# Altium PCB RoboRIOSPIBreakout.PcbDoc
Units mm, origin at the board's own origin, x right, y up, seen from the top; angles counter-clockwise.
Board outline 14.3 x 40.5 mm, 2 copper layers (Top Layer, Bottom Layer), stack 1.569 mm thick; 9 components, 9 nets, 36 pads, 0 vias.
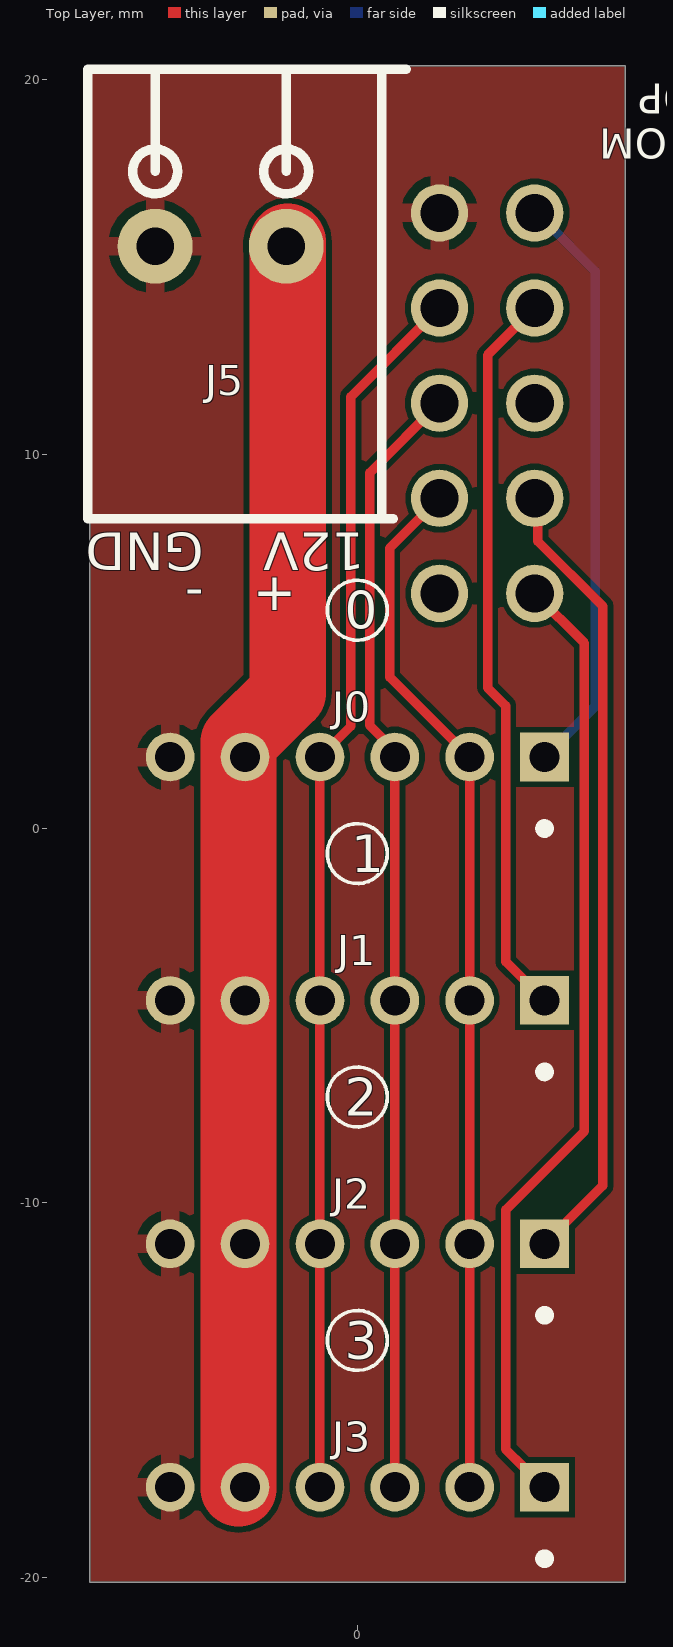
[diagram p0: Top Layer view]
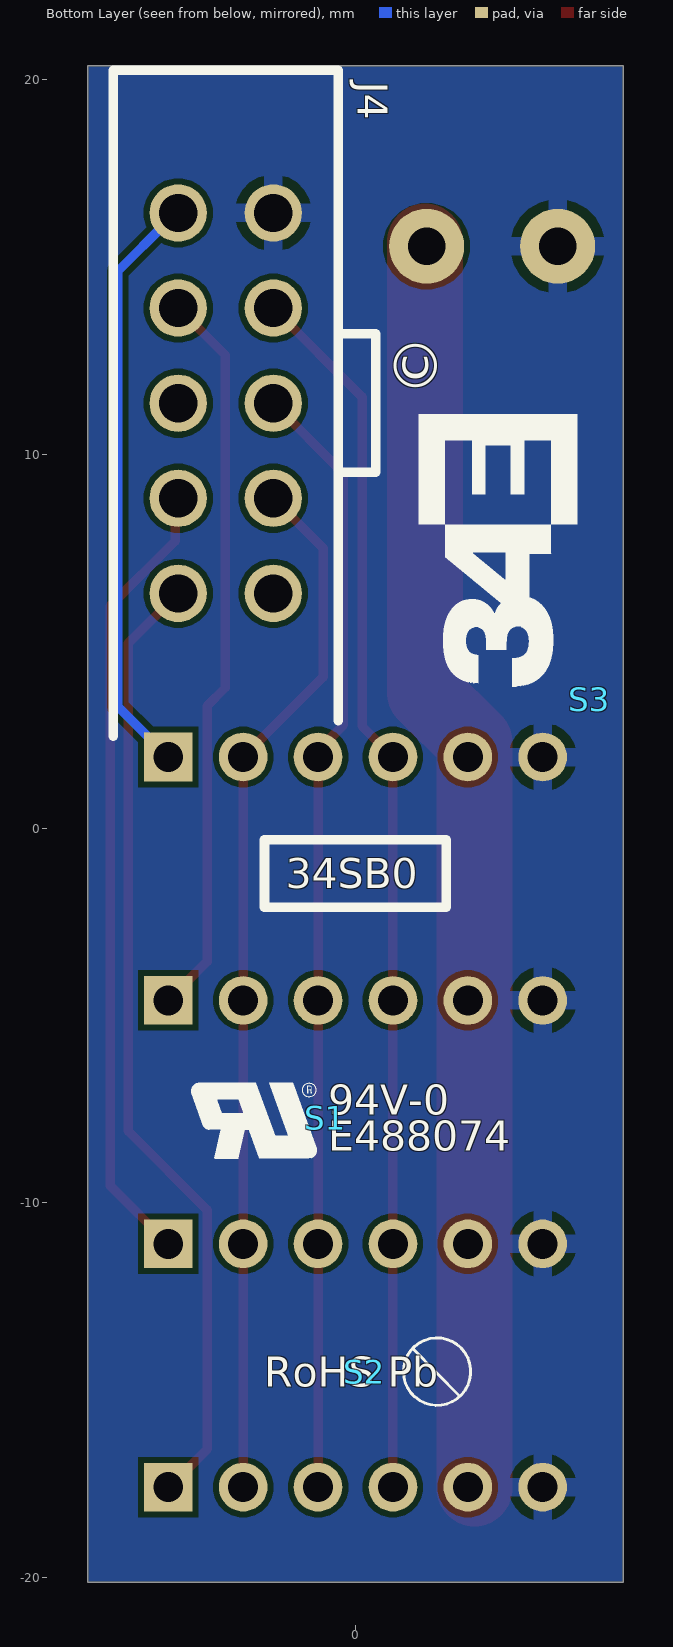
[diagram p1: Bottom Layer view, seen from below]
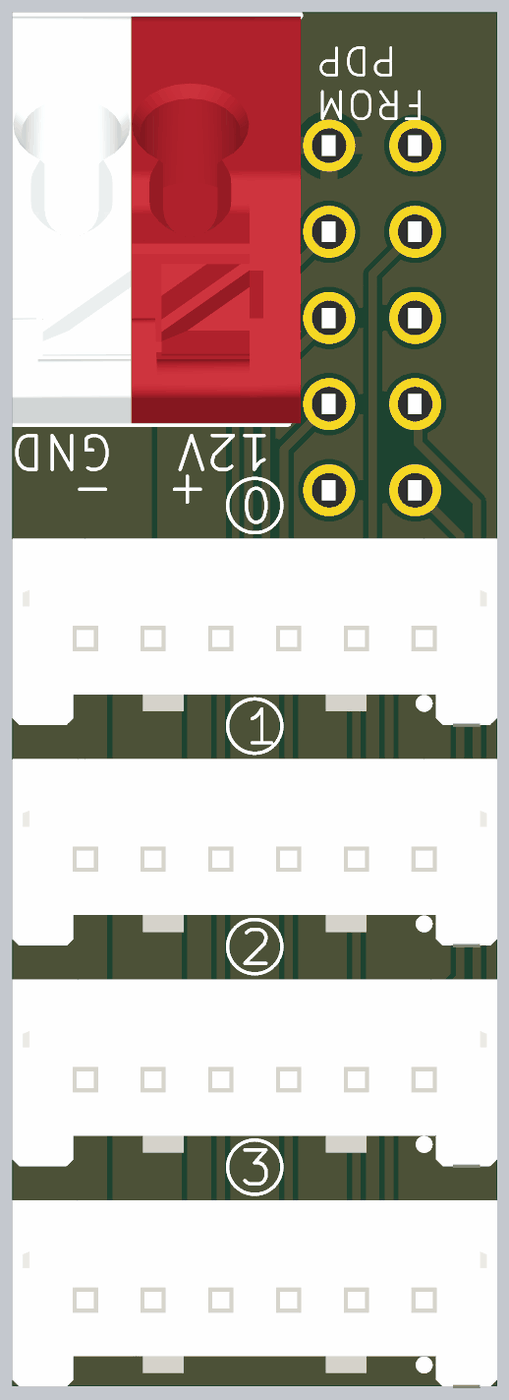
[diagram p2: 3D render of the assembled board from above, using the file's embedded part models]

## Layer stack, top to bottom
Top Solder: solder mask 0.0254, SM-002, Dk 4
Top Layer: signal copper 0.035
Dielectric 1: core 1.4986, Core-043, Dk 4.3
Bottom Layer: signal copper 0.035
Bottom Solder: solder mask 0.0254, SM-002, Dk 4

## Board outline
-7.15,-20.129 -7.15,20.371 7.15,20.371 7.15,-20.129

## Design rules (kind name [scope] priority, off if disabled: settings)
BoardOutlineClearance [IsPolygon] p1: gap=0.025 ignorepadtopadclearanceinfootprint=FALSE
Clearance [All] p1: gap=0.152 ignorepadtopadclearanceinfootprint=FALSE
MinimumSolderMaskSliver [All] p1: minsoldermaskwidth=0.203
PlaneConnect [All] p1: planeconnectstyle=Relief reliefexpansion=0.508 reliefentries=4 reliefconductorwidth=0.508 reliefairgap=0.254
PolygonConnect [All] p1: connectstyle=Relief reliefconductorwidth=0.508 reliefentries=4 polygonreliefangle="90 Angle" airgapwidth=0.254
RoutingVias [All] p1: holewidth=0.711 width=1.27 viastyle="Through Hole" minholewidth=0.711 minwidth=1.27 maxholewidth=0.711 maxwidth=1.27
SilkToSilkClearance [All] p1: silktosilkclearance=0
SilkToSolderMaskClearance [IsPad] p1: minsilkscreentomaskgap=0.152 clearancetoexposedcopper=TRUE
SolderMaskExpansion SolderMaskExpansion_Via [IsVia] p1: expansion=0.051 istentingtop=TRUE
SolderMaskExpansion [Not IsVia] p2: expansion=0.051 istentingtop=FALSE
Width [All] p1: maxlimit=2.54 minlimit=0.254 preferedwidth=0.254 minimp=50.000000 maximp=50.000000 favimp=50.000000
26 further rules are at their usual default settings.

## Components (designator, comment, footprint, x,y, rotation, side; value= is the part's Value field where it differs from the comment)
J0 "35362-0650" FP-35362-0650-MFG 0,2.11 r0 top locked
J1 "35362-0650" FP-35362-0650-MFG 0,-4.39 r0 top locked
J2 "35362-0650" FP-35362-0650-MFG 0,-10.89 r0 top locked
J3 "35362-0650" FP-35362-0650-MFG 0,-17.39 r0 top locked
J4 "SFH11-PBPC-D05-ST-BK" SFH11-PBPC-D05-ST-BK 3.465,11.36 r270 bottom locked
J5 "1713017" 1713017 -3.65,15.55 r180 top locked
S1 "" UL 0.813,-7.722 r180 bottom
S2 "" RoHS -0.229,-14.503 r180 bottom
S3 "" 34EngineeringLogo -6.248,3.454 r90 bottom

## Footprints (in the part's own frame and the unit in brackets; to place one, negate y for a bottom-side part, rotate by r counter-clockwise, add the part's x,y. Pads: shape width x height; smd on the part's side, far side on the other; paste and mask are expansions set on the pad)
34EngineeringLogo [mm]
  silkscreen extent 0.33,0.32 7.61,4.55
1713017 [mm]
  round 2 hole 1: 1(-1.75,0) 2(1.75,0)
  silkscreen extent -4.95,-4.72 3.55,7.27, body extent -5,-4.7 3.5,7.3, height 13.15
FP-35362-0650-MFG [mm]
  rect 1.3x1.3 hole 0.8 paste-1000 mask+0: 1(5,-0.2)
  round 1.3 hole 0.8 paste-1000 mask+0: 2(3,-0.2) 3(1,-0.2) 4(-1,-0.2) 5(-3,-0.2) 6(-5,-0.2)
  silkscreen extent 4.88,-2.23 5.13,-1.99, body extent -7.37,-2.95 7.37,2.95, height 0.25
RoHS [mm]
  silkscreen extent 1.05,-0.9 2.85,0.9
SFH11-PBPC-D05-ST-BK [mm]
  round 1.53 hole 1.02: 1(5.08,1.27) 2(2.54,1.27) 3(0,1.27) 4(-2.54,1.27) 5(-5.08,1.27) 6(-5.08,-1.27) 7(-2.54,-1.27) 8(0,-1.27) 9(2.54,-1.27) 10(5.08,-1.27)
  silkscreen extent -8.89,-3 8.89,4, body extent -8.89,-2.99 8.89,4.01, height 1.56
UL [mm]
  silkscreen extent -3.57,-1.1 -0.22,0.93

## Part data
J0 J1 J2 J3: library part CMP-04776-000268-1, "CONN HEADER VERT 6POS 2MM", Color=Natural, Contact Resistance=20mR, Current Rating=2A, Flammability Rating="UL94 V-0", Insulation Resistance=1GR, Max Operating Temperature=105°C, Max Voltage Rating (DC)=125.125kV, Min Operating Temperature=-40°C, Package Quantity=1000, Voltage Rating=125V, Contact Material=Brass, Contact Plating=Tin, Depth=5.5mm, Gender=Male, Glow Wire Compliant=Non-compliant, Halogen Free="Low Halogen", Height=8.5mm, Housing Color=Natural, Housing Material=Nylon, Lead Free="Lead Free", Lead Pitch=2mm, Length=14.3mm, Max Current Rating=2A, Mount="Through Hole", Number of Circuits=6, Number of Contacts=6, Number of Poles=6, Number of Positions=6, Number of Rows=1, Orientation=Vertical, Packaging=Bulk, Pitch=2mm, Radiation Hardening=No, Series=35362, Termination=Solder, Voltage Rating (AC)=125V, Voltage Rating (DC)=125V, Width=16.3mm
J4: "Female, 10C, Straight .100\"CC; No Mt. w/Center Polarizing Key; PBT, Brass, Gold Flash, 105 C", Color=Black, Manufacturer=Sullins, Package Quantity=1, Supplier Part Number 1=S9194-ND, Category=Connectors, ComponentLink1Description=https://datasheet.ciiva.com/754/sfh11-pxxc-dxx-st-xx11160-c-754555.pdf?src-supplier=Digi-Key, ComponentLink1URL=https://datasheet.ciiva.com/754/sfh11-pxxc-dxx-st-xx11160-c-754555.pdf?src-supplier=Digi-Key, Connector Type=Header, Contact Plating=Gold, Contact Type="Female Socket", Lead Free="Lead Free", Manufacturer Part Number=SFH11-PBPC-D05-ST-BK, Mount="Through Hole", Number of Positions=10, Number of Rows=2, Packaging=Tray, Pitch=0.1inch, Pricing 1="1=0.66000, 10=0.55300, 80=0.49700, 440=0.40661, 1000=0.36144, 5000=0.32630 (USD)", RoHS=Yes, RoHS Compliant=Yes, Row Spacing=0.1inch, Series=SFH11, Stock 1=44672, Supplier 1=Digi-Key, Termination=Solder
J5: "PCB Terminal Push-In 3.5mm 16AWG 250V 8A 2 Position Combicon Compact Series", Color=Multiple, Current=2A, Current Rating=8A, Manufacturer="Phoenix Contact", Package Quantity=1, Voltage=300V, Voltage Rating=250V, Category="Terminal Blocks", ComponentLink1Description=https://datasheet.ciiva.com/18620/1713017-18620870.pdf?src-supplier=Digi-Key, ComponentLink1URL=https://datasheet.ciiva.com/18620/1713017-18620870.pdf?src-supplier=Digi-Key, Height=13.1mm, Lead Free="Lead Free", Length=12mm, Manufacturer Part Number=1713017, Mount="Through Hole", Number of Levels=1, Number of Positions=2, Number of Positions Per Level=2, Packaging=Bulk, Pitch=0.138inch, Pricing 1="1=0.37150, 10=0.35410, 25=0.34670, 50=0.33270, 100=0.32070, 250=0.29670, 500=0.28610, 1000=0.28220 (USD)", RoHS=Yes, RoHS Compliant=Yes, Series="COMBICON PTSA", Stock 1=1500, Supplier 1="Arrow Electronics", Supplier Part Number 1=1713017, Termination=Screwless, Weight=0.038801oz, Wire Gauge (Max)=24AWG, Wire Gauge (Min)=16AWG
S1: library part UL
S2: library part RoHS
S3: library part 34EngineeringLogo, "34 Engineering Silkscreen Logo"

## Nets (pads, with @x,y where several pads share a name; then routed paths per layer and width w, separated by ;. In a path a pad name is that pad's centre, name@x,y a point inside that pad or via, vN(x,y) a via of type N, cw(c..) or ccw(c..) an arc to the next point about the centre after c; other vN are vias at no path point)
+12: J0.5 J1.5 J2.5 J3.5 J5.1 | length 33.8
  Top Layer w2.032: J3.5@-3.175,-17.628 -3.175,-4.59 -3.175,2.307 -1.859,3.622 J5.1@-1.859,15.672
CS0: J0.1 J4.6 | length 15.4
  Bottom Layer w0.254: J0.1 6.35,3.26 6.35,14.884 J4.6@5.037,16.197
CS1: J1.1 J4.7 | length 19.6
  Top Layer w0.254: J4.7 3.48,12.645 3.48,3.759 3.962,3.277 3.962,-3.552 J1.1
CS2: J2.1 J4.9 | length 21.3
  Top Layer w0.254: J4.9 4.818,8.737 4.818,7.674 6.553,5.939 6.553,-9.537 J2.1
CS3: J3.1 J4.10 | length 25.7
  Top Layer w0.254: J4.10 6.064,4.951 6.064,-8.084 3.963,-10.185 3.963,-16.582 4.448,-17.067 4.477,-17.067 J3.1
GND: J0.6 J1.6 J2.6 J3.6 J4.5 J5.2
MISO: J0.2 J1.2 J2.2 J3.2 J4.2 | length 27.8
  Top Layer w0.254: J4.2 0.864,7.489 0.864,4.046 J0.2 J1.2 J2.2 J3.2
MOSI: J0.3 J1.3 J2.3 J3.3 J4.3 | length 30
  Top Layer w0.254: J3.3 J2.3 J1.3 1,2.084 0.33,2.754 0.33,9.495 J4.3
SCLK: J0.4 J1.4 J2.4 J3.4 J4.4 | length 32.8
  Top Layer w0.254: J3.4 J2.4 J1.4 J0.4 -0.178,2.732 -0.178,11.527 J4.4
pads on no net: J4.1 J4.8

## Polygon pours and split planes (outlines as drawn)
GND on Bottom Layer "Bot GND Plane" (solid, pour order 0): 10.16,22.86 -10.16,22.86 -10.16,-22.86 10.16,-22.86
GND on Top Layer "Top GND Plane" (solid, pour order 1): 10.16,22.86 -10.16,22.86 -10.16,-22.86 10.16,-22.86

## Silkscreen, mask and mechanical layers (free items; w line width, h text height)
Top Overlay:
  circle w0.1: c0,-13.67 r0.8
  circle w0.1: c0,-7.17 r0.8
  circle w0.1: c0,5.83 r0.8
  circle w0.1: c0,-0.67 r0.8
  text "FROM / PDP" at 9.668,19.888 h0.8 r180
  text "GND" at -4.1,7.9 h1 r180
  text "12V" at 0.199,7.9 h1 r180
  text "-" at -4.1,6.7 h1 r180
  text "+" at -1.634,6.7 h1 r180
  text "0" at -0.333,5.33 h1
  text "1" at -0.167,-1.17 h1
  text "2" at -0.333,-7.67 h1
  text "3" at -0.333,-14.17 h1
Bottom Overlay:
  lines w0.254: -2.43,-2.102 2.43,-2.102 2.43,-0.298 -2.43,-0.298 -2.43,-2.102
  text "34SB0" at 1.866,-1.6 h0.8

## Text inside footprints (layer, text, board x,y; h text height)
S1: Bottom Overlay "E488074" at 0.733,-8.601 h0.8; Bottom Overlay "94V-0" at 0.733,-7.642 h0.8
S2: Bottom Overlay "RoHS Pb" at 2.437,-14.903 h0.8
S3: Bottom Overlay "©" at -2.574,11.559 h2 r270